# EAGLE board RPi_relay_board (EAGLE 6.4)
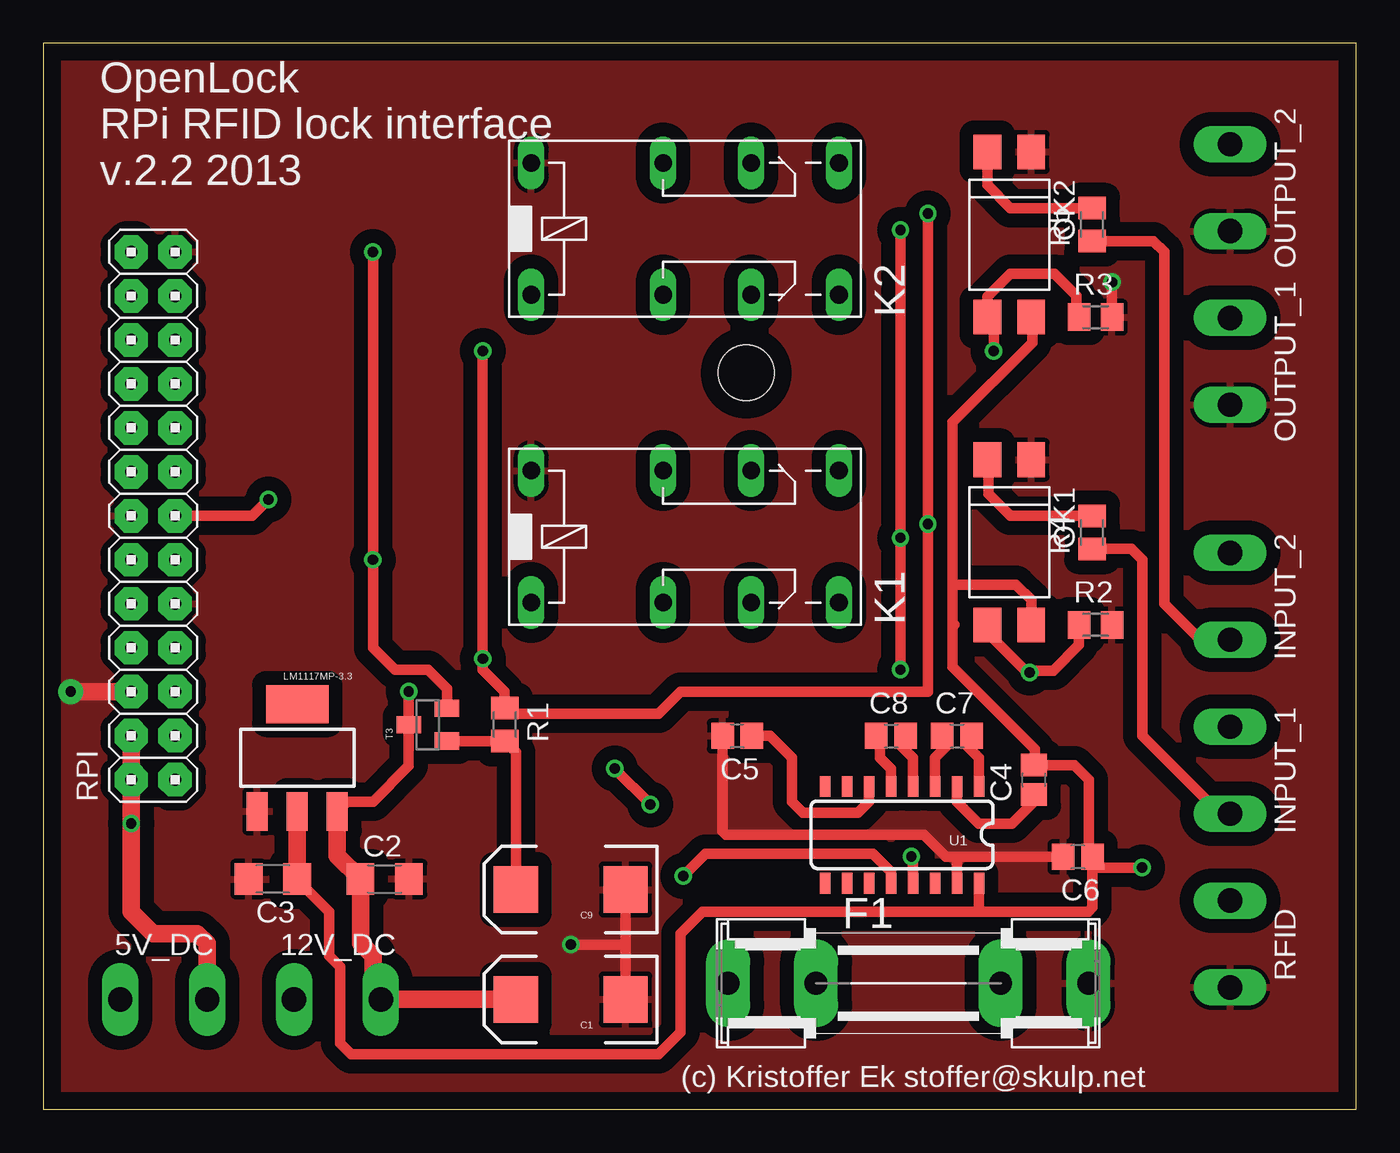
[diagram p0: board, top side]
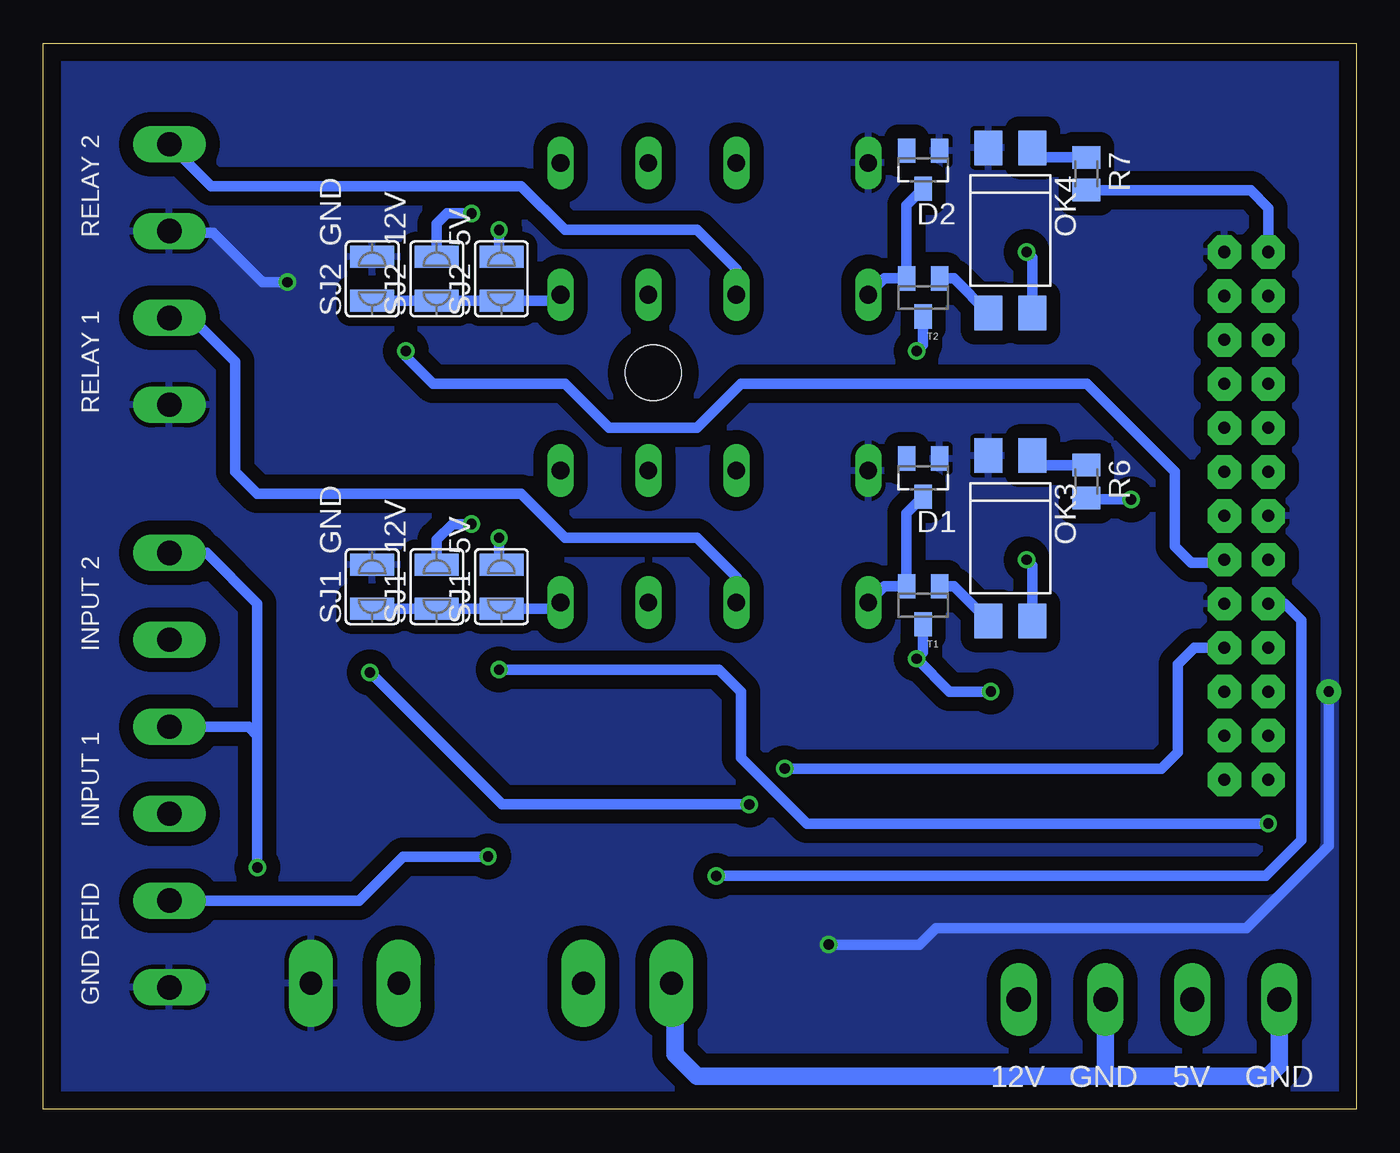
[diagram p1: board, bottom side, seen from below]

Size 75.87 x 61.59 mm. Coordinates in mm from the lower left corner, seen from the top.
Outline: 0,0 75.87,0 75.87,61.59 0,61.59 0,0
Copper layers (1*16): Top 0.035mm / dielectric 1.5mm / Bottom 0.035mm
Design rules "default": minimum track width 10mil, minimum drill 24mil, track to track 8mil, track to pad 8mil, pad to pad 8mil, via to via 8mil, smd to smd 8mil, copper to edge 40mil, drill to drill 8mil, minimum pad ring 10mil, minimum via ring 8mil, stop-mask expansion 4mil, vias tented up to drill 0mil, thermal gap 10mil
Net classes: 1 power: width 1.676 mm, clearance 0.508 mm
Holes 3.2 mm at 40.62,42.55

## Footprints (pad centres in the part's own frame; a part is rotated, then mirrored left to right if it is on the bottom)
1X02_LONGPADS = drill 1.4 pad 1.93 long: 1 0,0; 2 5.02,0
EIA7343 = smd 2.55 x 2.7: A 3.17,0; C -3.17,0
C3216 = smd 1.6 x 1.8: 1 -1.4,0; 2 1.4,0
C2012 = smd 1.3 x 1.5: 1 -0.85,0; 2 0.85,0
SOT23 = smd 1 x 1.4: 1 -0.95,-1.1; 2 0.95,-1.1; 3 0,1.1
SHK20L = drill 1.321 pad 2.54 long: 1A -10.414,0; 1B -5.334,0; 2A 10.414,0; 2B 5.334,0
351 = drill 1.016 long: 1 -3.81,-3.81; 16 -3.81,3.81; O1 8.89,-3.81; O2 8.89,3.81; P1 3.81,-3.81; P2 3.81,3.81; S1 13.97,-3.81; S2 13.97,3.81
SOT223 = smd 1.219 x 2.235: 1 -2.311,-3.099; 2 0,-3.099; 3 2.311,-3.099 | smd 3.6 x 2.2: 4 0,3.099
DIL4-SMD = smd 1.6 x 2: 1 -1.27,-4.77; 2 1.27,-4.77; 3 1.27,4.77; 4 -1.27,4.77
M0805 = smd 1.3 x 1.6: 1 -0.95,0; 2 0.95,0
2X13 = drill 0.7 pad 1.93 octagon: 1 -15.24,-1.27; 2 -15.24,1.27; 3 -12.7,-1.27; 4 -12.7,1.27; 5 -10.16,-1.27; 6 -10.16,1.27; 7 -7.62,-1.27; 8 -7.62,1.27; 9 -5.08,-1.27; 10 -5.08,1.27; 11 -2.54,-1.27; 12 -2.54,1.27; 13 0,-1.27; 14 0,1.27; 15 2.54,-1.27; 16 2.54,1.27; 17 5.08,-1.27; 18 5.08,1.27; 19 7.62,-1.27; 20 7.62,1.27; 21 10.16,-1.27; 22 10.16,1.27; 23 12.7,-1.27; 24 12.7,1.27; 25 15.24,-1.27; 26 15.24,1.27
SJW = smd 1.27 x 2.54: 1 -1.27,0; 2 1.27,0
SO016 = smd 0.6 x 1.2: 1 -4.445,-2.8; 2 -3.175,-2.8; 3 -1.905,-2.8; 4 -0.635,-2.8; 5 0.635,-2.8; 6 1.905,-2.8; 7 3.175,-2.8; 8 4.445,-2.8; 9 4.445,2.8; 10 3.175,2.8; 11 1.905,2.8; 12 0.635,2.8; 13 -0.635,2.8; 14 -1.905,2.8; 15 -3.175,2.8; 16 -4.445,2.8

## Placement (x,y rotation side)
5V_DC  [1X02_LONGPADS]  4.45,6.35 0 top
12V_DC  [1X02_LONGPADS]  14.48,6.35 0 top
C1  330nF  [EIA7343]  30.48,6.35 180 top
C2  330nF  [C3216]  19.73,13.31 0 top
C3  100nF  [C3216]  13.27,13.31 180 top
C4  100nF  [C2012]  57.24,19.03 90 top
C5  100nF  [C2012]  40.1,21.57 180 top
C6  100nF  [C2012]  59.78,14.59 180 top
C7  100nF  [C2012]  52.8,21.57 0 top
C8  100nF  [C2012]  48.99,21.57 0 top
C9  330nF  [EIA7343]  30.48,12.7 180 top
D1  BAS21LT3G  [SOT23]  25.03,36.5 180 bottom
D2  BAS21LT3G  [SOT23]  25.03,54.28 180 bottom
F1  [SHK20L]  49.99,7.29 0 top
INPUT_1  [1X02_LONGPADS]  68.58,22.11 270 top
INPUT_2  [1X02_LONGPADS]  68.58,32.15 270 top
K1  351  [351]  32.01,33.09 0 top
K2  351  [351]  32.01,50.87 0 top
LM1117MP-3.3  [SOT223]  14.68,20.32 0 top
OK1  SFH6206  [DIL4-SMD]  55.82,32.76 180 top
OK2  SFH6206  [DIL4-SMD]  55.82,50.54 180 top
OK3  SFH6206  [DIL4-SMD]  19.99,32.99 180 bottom
OK4  SFH6206  [DIL4-SMD]  19.99,50.77 180 bottom
OUTPUT_1  [1X02_LONGPADS]  68.58,45.72 270 top
OUTPUT_2  [1X02_LONGPADS]  68.58,55.76 270 top
R1  100k  [M0805]  26.67,22.23 270 top
R2  10k  [M0805]  60.81,27.99 0 top
R3  10k  [M0805]  60.81,45.77 0 top
R4  82  [M0805]  60.6,33.33 90 top
R5  82  [M0805]  60.6,51.11 90 top
R6  82  [M0805]  15.59,36.27 270 bottom
R7  82  [M0805]  15.59,54.05 270 bottom
RFID  [1X02_LONGPADS]  68.58,12.06 270 top
RPI  [2X13]  6.35,34.29 90 top
SJ1_5V  [SJW]  49.4,30.2 90 bottom
SJ1_12V  [SJW]  53.13,30.2 90 bottom
SJ1_GND  [SJW]  56.86,30.2 90 bottom
SJ2_5V  [SJW]  49.4,47.98 90 bottom
SJ2_12V  [SJW]  53.13,47.98 90 bottom
SJ2_GND  [SJW]  56.86,47.98 90 bottom
T1  ZXTN2020F  [SOT23]  25.03,29.12 180 bottom
T2  ZXTN2020F  [SOT23]  25.03,46.9 180 bottom
T3  ZXTN2020F  [SOT23]  22.22,22.23 90 top
U1  MAX232SOIC16  [SO016]  49.62,15.86 180 top

## Library data of the parts
5V_DC 12V_DC C1 C9 INPUT_1 INPUT_2 LM1117MP-3.3 OUTPUT_1 OUTPUT_2 RFID T1-T3 U1 = SparkFun
C2-C8 R1-R7 = rcl
D1 D2 = diode
F1 = fuse; OC_FARNELL: unknown; OC_NEWARK: unknown
K1 K2 = relay; OC_FARNELL: unknown; OC_NEWARK: unknown
OK1-OK4 = optocoupler; MF: VISHAY/TELEFUNKEN; MPN: SFH6206-3; OC_FARNELL: 1469585; OC_NEWARK: 58K2214
RPI = RPi_pinhead
SJ1_5V SJ1_12V SJ1_GND SJ2_5V SJ2_12V SJ2_GND = jumper

## Nets
3.3V: C3.1 C4.2 C6.1 INPUT_1.1 INPUT_2.1 LM1117MP-3.3.2 OK1.4 OK2.4 U1.16
+5V [power]: 5V_DC.2 RPI.2 RPI.4 SJ1_5V.2 SJ2_5V.2
+12V: 12V_DC.2 C1.A C2.1 LM1117MP-3.3.3 R1.1 SJ1_12V.2 SJ2_12V.2 T1.3 T2.3 T3.3
GND [power]: C1.C C2.2 C3.2 C5.2 C6.2 C9.C D1.1 D2.1 F1.2A K1.16 K2.16 LM1117MP-3.3.1 OK1.1 OK2.1 OK3.2 OK4.2 OUTPUT_1.2 OUTPUT_2.2 R2.2 R3.2 RFID.2 RPI.6 RPI.9 RPI.14 RPI.25 SJ1_GND.2 SJ2_GND.2 U1.15
N$1: OK2.3 R3.1 RPI.11
N$2: OK1.2 R4.2
N$3: INPUT_1.2 R4.1
N$4: OK1.3 R2.1 RPI.7
N$5: INPUT_2.2 R5.1
N$6: R7.2 RPI.26
N$7: OK4.3 T2.1
N$8: OK3.3 T1.1
N$9: OK2.2 R5.2
N$10: C9.A R1.2 T3.1
N$11: D2.3 K2.1 T2.2
N$12: D1.3 K1.1 T1.2
N$13: C7.2 U1.1
N$14: OK3.4 OK4.4 T3.2
N$15: RPI.10 U1.12
N$16: RFID.1 U1.13
N$17: 5V_DC.1 12V_DC.1 F1.1A
N$18: K2.S1 SJ2_5V.1 SJ2_12V.1 SJ2_GND.1
N$19: OK4.1 R7.1
N$20: K1.S1 SJ1_5V.1 SJ1_12V.1 SJ1_GND.1
N$21: K2.P1 OUTPUT_2.1
N$22: K1.P1 OUTPUT_1.1
N$31: C8.2 U1.4
N$32: C7.1 U1.3
N$35: C8.1 U1.5
N$36: C4.1 U1.2
N$37: C5.1 U1.6
N$44: R6.2 RPI.13
N$51: OK3.1 R6.1

## Tracks (layer width: path | path; a pad name or v marks a point on that pad's centre or on a via)
3.3V  (via drill 0.6)
  Top 0.61: C3.1 14.68,13.26 16.51,11.43 16.51,8.89 17.14,8.25 17.14,3.81 17.78,3.17 35.56,3.17 36.83,4.44 36.83,10.16 38.1,11.43 54.03,11.43 | 54.03,11.43 60.38,11.43 60.64,11.68 60.64,13.97 | U1.16 54.07,11.47 54.03,11.43 | 60.64,13.97 C6.1 60.42,14.8 60.42,19.04 59.57,19.88 C4.2 57.31,19.95 57.31,20.8 52.55,25.56 52.55,28.1 | v63.5,13.97 60.64,13.97 | 52.55,28.1 52.55,30.32 | 52.55,30.32 52.55,39.69 57.15,44.29 57.15,45.71 OK2.4 | 52.66,27.98 52.55,28.1 | OK1.4 57.09,29.43 56.2,30.32 52.55,30.32
  Top 1.016: LM1117MP-3.3.2 C3.1
  Bottom 0.61: INPUT_2.1 66.44,32.15 63.5,29.21 63.5,21.59 | 63.5,21.59 v63.5,13.97 | INPUT_1.1 64.02,22.11 63.5,21.59
+5V  (via drill 0.6)
  Top 0.61: v49.53,25.4 v49.53,33.02 v49.53,50.8
  Top 1.016: RPI.4 RPI.2 v5.08,16.51 5.08,11.43 6.35,10.16 8.89,10.16 9.46,9.58 5V_DC.2
  Bottom 0.61: v5.08,16.51 31.75,16.51 35.56,20.32 35.56,24.13 36.83,25.4 v49.53,25.4 | v49.53,50.8 49.53,49.38 SJ2_5V.2 | SJ1_5V.2 49.46,31.47 49.54,31.55 49.54,33.01 v49.53,33.02
+12V  (via drill 0.6)
  Top 0.61: LM1117MP-3.3.3 17.55,17.78 19.05,17.78 21.12,19.86 T3.3 v21.11,24.13 | v25.4,43.82 v25.4,26.03 25.4,25.4 26.67,24.13 R1.1 26.67,22.86 35.56,22.86 36.83,24.13 51.12,24.13 v51.12,33.81 v51.12,51.75
  Top 1.016: LM1117MP-3.3.3 16.99,14.66 C2.1 18.33,9.61 19.05,8.89 19.05,6.8 12V_DC.2 C1.A
  Bottom 0.61: T2.3 25.03,44.19 v25.4,43.82 | T1.3 25.03,26.41 v25.4,26.03 23.49,24.13 v21.11,24.13 | 53.02,49.36 SJ2_12V.2 53.13,51.17 52.55,51.75 v51.12,51.75 | SJ1_12V.2 53.13,32.91 52.23,33.81 v51.12,33.81
GND  (via drill 0.6, 0.6 pad 1.42)
  Top 0.61: C6.2 52.8,14.59 | 52.8,14.59 52.16,14.59 50.89,15.86 39.46,15.86 39.25,16.07 C5.2 | U1.15 52.8,14.59 | C1.C C9.C 33.65,9.68 33.5,9.52 v30.48,9.52 | R3.2 v61.76,47.78 v61.75,47.78
  Top 1.016: RPI.6 v1.59,24.13
  Bottom 0.61: v30.48,9.52 25.24,9.52 24.29,10.48 6.35,10.48 1.59,15.24 v1.59,24.13 | v61.75,47.78 63.18,47.78 66.04,50.64 68.48,50.64 OUTPUT_2.2
  pour Bottom (isolate 0.813): 0.63,60.96 74.93,60.96 74.93,0.63 0.63,0.63
  pour Top (isolate 0.813, rank 2): 0.63,60.96 74.93,60.96 74.93,0.63 0.63,0.63
N$1  (via drill 0.6)
  Top 0.61: R3.1 59.69,45.94 59.69,46.99 58.42,48.26 55.88,48.26 54.55,46.93 OK2.3 54.55,45.62 54.93,45.24 v54.93,43.82
  Bottom 0.61: v54.93,43.82 54.93,43.5 53.34,41.91 45.72,41.91 43.18,39.37 38.1,39.37 35.56,41.91 15.56,41.91 10.48,36.83 10.48,32.54 9.52,31.59 7.78,31.59 RPI.11
N$2
  Top 0.61: R4.2 55.89,34.28 54.61,35.56 54.61,37.47 OK1.2
N$3
  Top 0.61: R4.1 62.87,32.38 63.5,31.75 63.5,21.59 67.31,17.78 67.89,17.78 INPUT_1.2
N$4  (via drill 0.6)
  Top 0.61: v35.08,17.62 v33.02,19.69 | 54.55,27.68 OK1.3 54.93,27.61 54.93,27.15 56.83,25.24 v56.99,25.24 57.09,25.34 58.36,25.34 59.85,26.83 59.85,27.98 R2.1
  Bottom 0.61: v56.99,25.24 49.37,17.62 v35.08,17.62 | v33.02,19.69 11.27,19.69 10.32,20.64 10.32,25.72 9.37,26.67 RPI.7
N$5
  Top 0.61: R5.1 64.14,50.16 64.77,49.53 64.77,29.21 67.31,26.67 68.12,26.67 INPUT_2.2
N$6
  Bottom 0.61: R7.2 6.11,53.1 5.08,52.07 RPI.26
N$7
  Bottom 0.61: T2.1 23.25,48 OK4.3
N$8
  Bottom 0.61: T1.1 23.25,30.22 OK3.3
N$9
  Top 0.61: OK2.2 54.55,53.4 55.88,52.07 R5.2
N$10
  Top 0.61: C9.A 27.31,20.63 R1.2 T3.1
N$11
  Bottom 0.61: K2.1 27.26,48 T2.2 25.98,52.23 D2.3
N$12
  Bottom 0.61: K1.1 27.26,30.22 T1.2 25.98,34.44 D1.3
N$13
  Top 0.61: U1.1 54.07,20.3 53.44,20.94 53.44,21.36 C7.2
N$14  (via drill 0.6)
  Top 0.61: T3.2 23.33,24.3 22.22,25.4 20.32,25.4 19.05,26.67 v19.05,31.75 v19.05,49.53
  Bottom 0.61: OK4.4 18.72,49.2 v19.05,49.53 | OK3.4 18.72,31.42 v19.05,31.75
N$15  (via drill 0.6)
  Top 0.61: U1.12 48.99,13.72 47.94,14.76 38.26,14.76 v36.99,13.49
  Bottom 0.61: v36.99,13.49 5.24,13.49 3.17,15.56 3.17,28.26 4.13,29.21 RPI.10
N$16  (via drill 0.6)
  Top 0.61: U1.13 50.26,14.51 v50.16,14.61
  Bottom 0.61: v50.16,14.61 55.09,14.61 57.63,12.06 RFID.1
N$17
  Bottom 1.016: 5V_DC.1 4.45,2.54 5.08,1.9 14.61,1.9 | 14.61,1.9 38.1,1.9 39.37,3.17 39.37,7.08 F1.1A | 12V_DC.1 14.48,2.02 14.61,1.9
N$18
  Bottom 0.61: K2.S1 46.33,46.71 SJ2_5V.1 SJ2_12V.1 SJ2_GND.1
N$19
  Bottom 0.61: R7.1 18.17,55 OK4.1
N$20
  Bottom 0.61: K1.S1 46.33,28.93 SJ1_5V.1 SJ1_12V.1 SJ1_GND.1
N$21
  Bottom 0.61: K2.P1 35.82,48.52 38.1,50.8 45.72,50.8 48.26,53.34 66.16,53.34 OUTPUT_2.1
N$22
  Bottom 0.61: K1.P1 35.82,30.74 38.1,33.02 45.72,33.02 48.26,35.56 63.5,35.56 64.77,36.83 64.77,43.18 67.31,45.72 OUTPUT_1.1
N$31
  Top 0.61: U1.4 50.26,20.3 49.62,20.94 49.62,21.36 C8.2
N$32
  Top 0.61: U1.3 51.53,20.3 52.16,20.94 52.16,21.36 C7.1
N$35
  Top 0.61: U1.5 48.99,19.67 48.35,20.3 48.35,21.36 C8.1
N$36
  Top 0.61: C4.1 57.25,17.77 55.97,16.49 54.07,16.49 52.8,17.77 U1.2
N$37
  Top 0.61: U1.6 47.72,17.77 47.09,17.13 43.91,17.13 43.27,17.77 43.27,20.3 42.01,21.57 C5.1
N$44  (via drill 0.6)
  Top 0.61: RPI.13 12.06,34.29 v13.02,35.24
  Bottom 0.61: v13.02,35.24 15.52,35.24 R6.2
N$51
  Bottom 0.61: R6.1 18.17,37.22 OK3.1

## Text on the board
tNames: OpenLock / RPi RFID lock interface / v.2.2 2013 | (c) Kristoffer Ek stoffer@skulp.net
bNames: RELAY 2 | RELAY 1 | INPUT 2 | INPUT 1 | RFID | GND | GND | 5V | GND | 12V